# Altium PCB PCB.PcbDoc
Units mil, origin at the board's own origin, x right, y up, seen from the top; angles counter-clockwise.
Board outline 3800 x 2950 mil, 4 copper layers (Top Layer, Signal Layer 1, Signal Layer 2, Bottom Layer), stack 30.634 mil thick; 46 components, 34 nets, 210 pads, 60 vias.
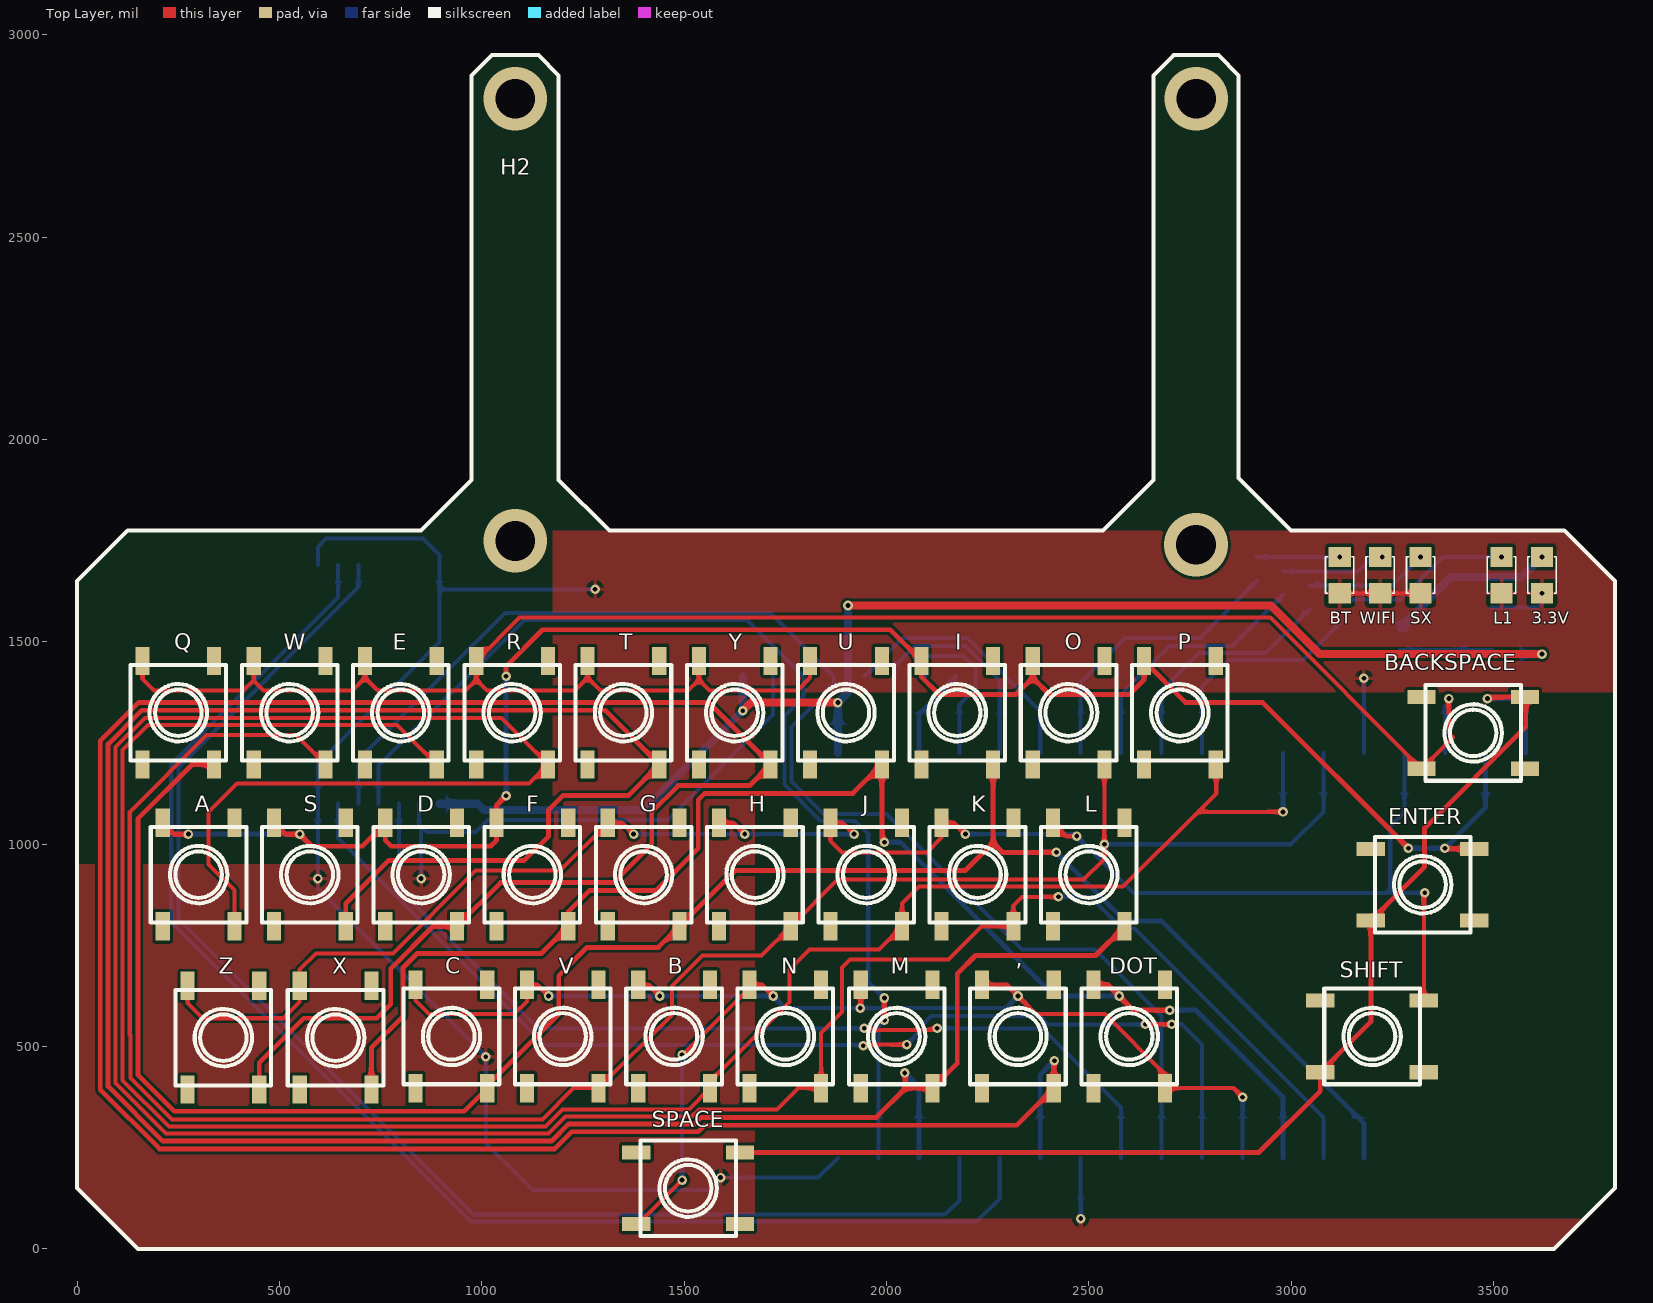
[diagram p0: Top Layer view]
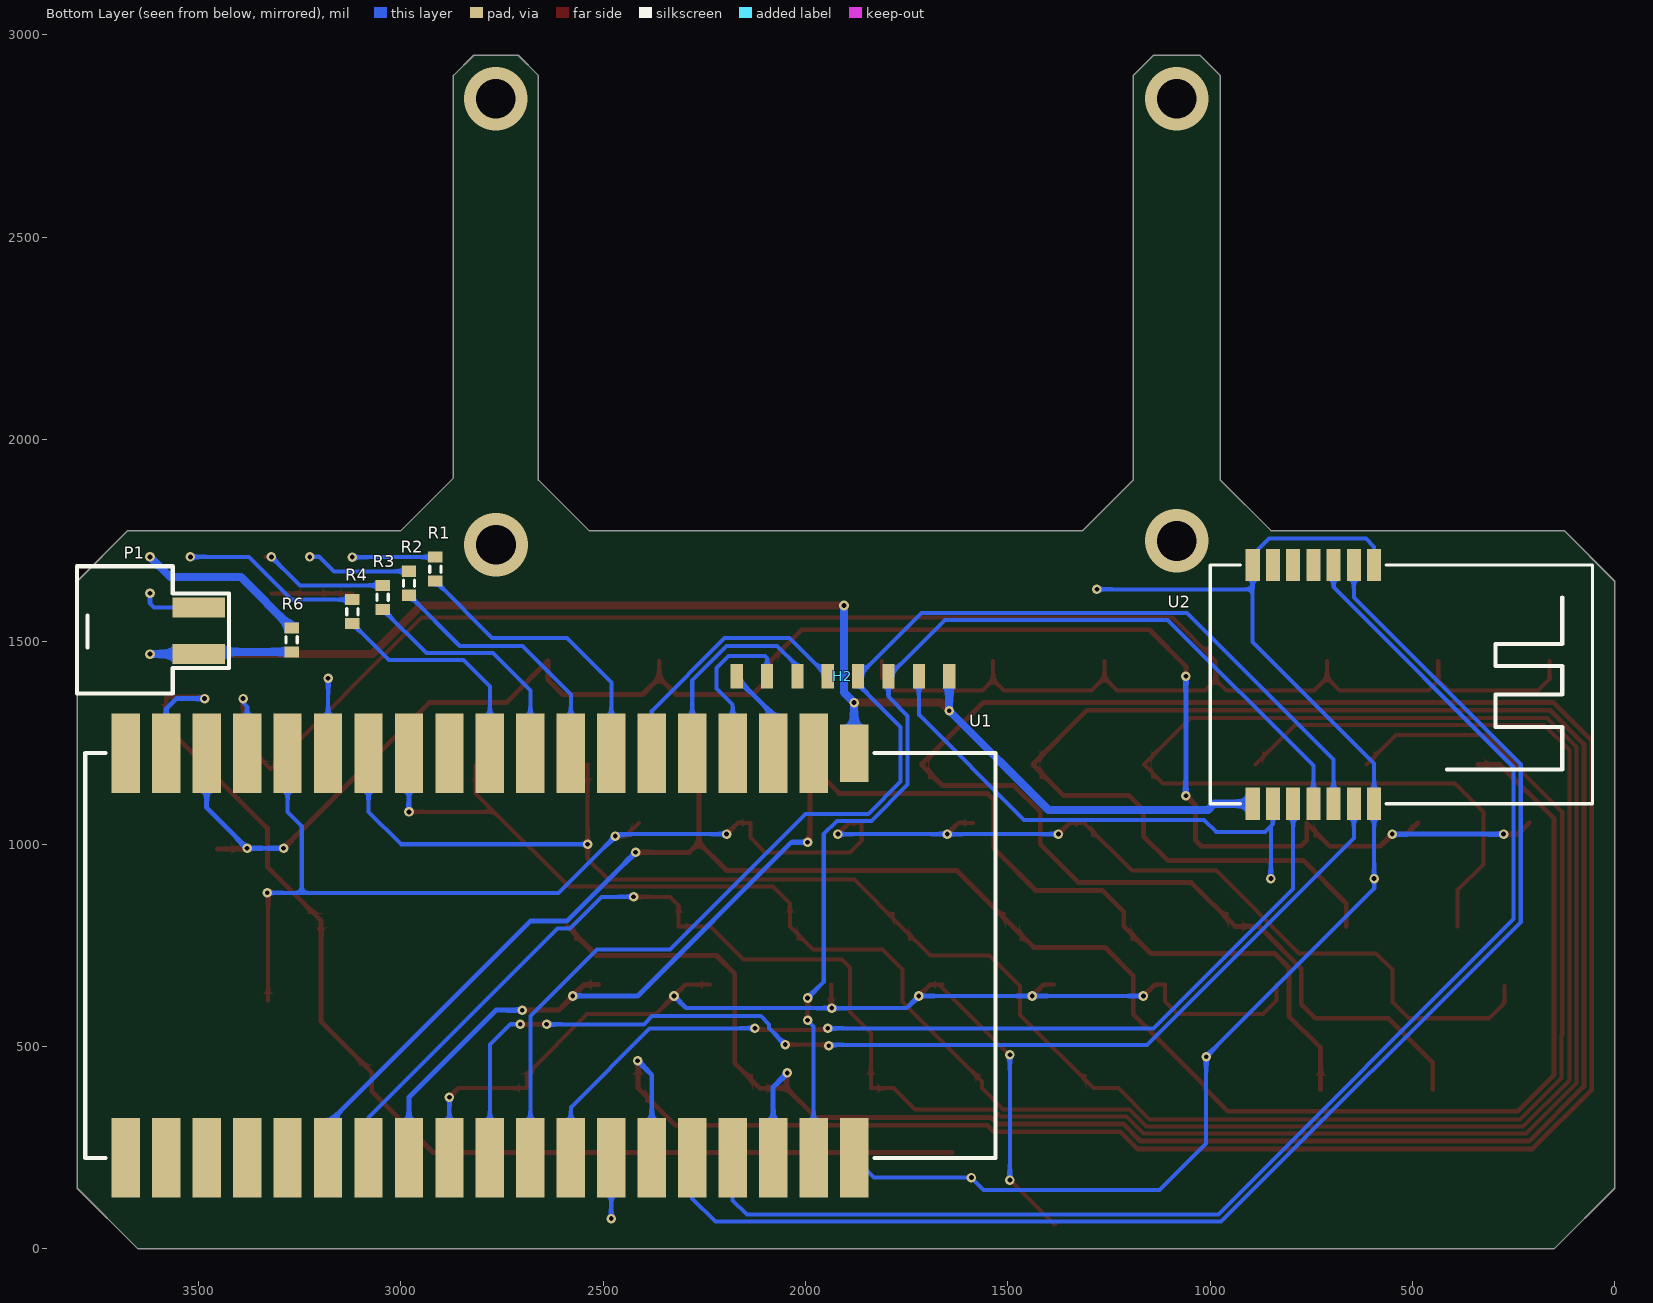
[diagram p1: Bottom Layer view, seen from below]

## Layer stack, top to bottom
Top Solder: solder mask 0.4, Solder Resist, Dk 3.5
Top Layer: signal copper 1.4
Dielectric 1: core 10, FR-4, Dk 4.2
Signal Layer 1: signal copper 1.417
Dielectric 3: prepreg 5, Dk 4.2
Signal Layer 2: signal copper 1.417
Dielectric 2: core 10, Dk 4.2
Bottom Layer: signal copper 1.4
Bottom Solder: solder mask 0.4, Solder Resist, Dk 3.5

## Board outline
0,150 150,0 3650,0 3800,150 3800,1650 3675,1775 3000,1775 2870,1905 2870,2900 2820,2950 2710,2950 2660,2900 2660,1900 2535,1775 1315,1775 1190,1900 1190,2900 1140,2950 1025,2950 975,2900 975,1900 850,1775 125,1775 0,1650

## Design rules (kind name [scope] priority, off if disabled: settings)
Clearance [All] p1: gap=7.5 ignorepadtopadclearanceinfootprint=FALSE except(0: Arc-Hole Track-Hole SMDPad-Hole THPad-Hole Via-Hole Fill-Hole Poly-Hole Region-Hole Text-Hole)
PolygonConnect [All] p1: connectstyle=Relief reliefconductorwidth=10 reliefentries=4 polygonreliefangle="90 Angle" airgapwidth=10
RoutingVias [All] p1: holewidth=11.81 width=50 viastyle="Through Hole" minholewidth=11.81 minwidth=17.72 maxholewidth=11.81 maxwidth=23.62
SolderMaskExpansion [All] p1: expansion=4
Width [All] p1: maxlimit=30 minlimit=8 preferedwidth=10 minimp=50.000000 maximp=50.000000 favimp=50.000000
30 further rules are at their usual default settings.

## Components (designator, comment, footprint, x,y, rotation, side; value= is the part's Value field where it differs from the comment)
3.3V "LED SMD" SM-LED-0805-Blue 3620,1710 r270 top (schematic designator L3.3V)
, "SW" Kha_Button 2325,525 r90 top value="Button chip 4 pin"
A "SW" Kha_Button 300,925 r90 top value="Button chip 4 pin"
B "SW" Kha_Button 1475,525 r90 top value="Button chip 4 pin"
BACKSPACE "SW" Kha_Button 3450,1275 r180 top value="Button chip 4 pin"
BT "LED SMD" SM-LED-0805-Blue 3120,1710 r270 top
C "SW" Kha_Button 925,525 r90 top value="Button chip 4 pin"
D "SW" Kha_Button 850,925 r90 top value="Button chip 4 pin"
DOT "SW" Kha_Button 2600,525 r270 top value="Button chip 4 pin"
E "SW" Kha_Button 800,1325 r90 top value="Button chip 4 pin"
ENTER "SW" Kha_Button 3325,900 r0 top value="Button chip 4 pin"
F "SW" Kha_Button 1125,925 r90 top value="Button chip 4 pin"
G "SW" Kha_Button 1400,925 r90 top value="Button chip 4 pin"
H "SW" Kha_Button 1675,925 r90 top value="Button chip 4 pin"
H2 "EInk LCD Module" EInk_Module 1870,1415 r0 top
I "SW" Kha_Button 2175,1325 r90 top value="Button chip 4 pin"
J "SW" Kha_Button 1950,925 r90 top value="Button chip 4 pin"
K "SW" Kha_Button 2225,925 r90 top value="Button chip 4 pin"
L "SW" Kha_Button 2500,925 r90 top value="Button chip 4 pin"
L1 "LED SMD" SM-LED-0805-Blue 3520,1710 r270 top
M "SW" Kha_Button 2025,525 r90 top value="Button chip 4 pin"
N "SW" Kha_Button 1750,525 r90 top value="Button chip 4 pin"
O "SW" Kha_Button 2450,1325 r90 top value="Button chip 4 pin"
P "SW" Kha_Button 2725,1325 r90 top value="Button chip 4 pin"
P1 "Header 2" "Header 2 SMT" 3700,1550 r90 bottom
Q "SW" Kha_Button 250,1325 r90 top value="Button chip 4 pin"
R "SW" Kha_Button 1075,1325 r90 top value="Button chip 4 pin"
R1 "Res3" J1-0603 2915,1680 r270 bottom value=330
R2 "Res3" J1-0603 2980,1645 r270 bottom value=330
R3 "Res3" J1-0603 3045,1610 r270 bottom value=330
R4 "Res3" J1-0603 3120,1575 r270 bottom value=330
R6 "Res3" J1-0603 3270,1505 r270 bottom value=330
S "SW" Kha_Button 575,925 r90 top value="Button chip 4 pin"
SHIFT "SW" Kha_Button 3200,525 r0 top value="Button chip 4 pin"
SPACE "SW" Kha_Button 1510,150 r180 top value="Button chip 4 pin"
SX "LED SMD" SM-LED-0805-Blue 3320,1710 r270 top
T "SW" Kha_Button 1350,1325 r90 top value="Button chip 4 pin"
U "SW" Kha_Button 1900,1325 r90 top value="Button chip 4 pin"
U1 "ESP32 Module" "ESP2 Module" 2880,725 r270 bottom
U2 "SX1280 Module" "SX1280 Module" 445,1400 r270 bottom
V "SW" Kha_Button 1200,525 r90 top value="Button chip 4 pin"
W "SW" Kha_Button 525,1325 r90 top value="Button chip 4 pin"
WIFI "LED SMD" SM-LED-0805-Blue 3220,1710 r270 top
X "SW" Kha_Button 638.58,522.05 r90 top value="Button chip 4 pin"
Y "SW" Kha_Button 1625,1325 r90 top value="Button chip 4 pin"
Z "SW" Kha_Button 361.42,522.05 r90 top value="Button chip 4 pin"

## Footprints (in the part's own frame and the unit in brackets; to place one, negate y for a bottom-side part, rotate by r counter-clockwise, add the part's x,y. Pads: shape width x height; smd on the part's side, far side on the other; paste and mask are expansions set on the pad)
EInk_Module [mil]
  rect 30x60 smd far side: 1(-225,0) 2(-150,0) 3(-75,0) 4(0,0) 5(75,0) 6(150,0) 7(225,0) 8(300,0)
"ESP2 Module" [mil]
  rect 141.73x70 smd: 1(-500,1000)
  rect 196.85x70 smd: 2(-500,900) 3(-500,800) 4(-500,700) 5(-500,600) 6(-500,500) 7(-500,400) 8(-500,300) 9(-500,200) 10(-500,100) 11(-500,0) 12(-500,-100) 13(-500,-200) 14(-500,-300) 15(-500,-400) 16(-500,-500) 17(-500,-600) 18(-500,-700) 19(-500,-800) 20(500,-800) 21(500,-700) 22(500,-600) 23(500,-500) 24(500,-400) 25(500,-300) 26(500,-200) 27(500,-100) 28(500,0) 29(500,100) 30(500,200) 31(500,300) 32(500,400) 33(500,500) 34(500,600) 35(500,700) 36(500,800) 37(500,900) 38(500,1000)
  silkscreen extent -500,-900 500,1350
"Header 2 SMT" [mil]
  rect 50x130 smd: 1(-80,-200) 2(35,-200)
  silkscreen extent -178,-275 137,100
J1-0603 [mm] "Chip Resistor, Body 1.6x0.8mm, IPC High Density"
  rect 0.7x0.9 smd: 1(-0.75,0) 2(0.75,0)
  silkscreen extent -0.2,-0.35 0.2,0.35, body extent -0.85,-0.48 0.85,0.48, height 0.9
Kha_Button [mil] "SW button 4pin, 250 x250 mil"
  rect 70x35 smd: 1(-127.95,88.58) 2(127.95,88.58) 3(-127.95,-88.58) 4(127.95,-88.58)
  silkscreen extent -118,-118 118,118
SM-LED-0805-Blue [mil]
  rect 50x55 smd: 1(0,0) 2(90,0)
  silkscreen extent 0,-35 90,35, body extent 5,-25 85,25, height 43
"SX1280 Module" [mil]
  rect 80x35 smd: 1(-290,-150) 2(-290,-200) 3(-290,-250) 4(-290,-300) 5(-290,-350) 6(-290,-400) 7(-290,-450) 8(300,-450) 9(300,-400) 10(300,-350) 11(300,-300) 12(300,-250) 13(300,-200) 14(300,-150)
  silkscreen extent -290,-555 300,390

## Part data
3.3V BT L1 SX WIFI: library part LED-SMD-0805
, A B BACKSPACE C D DOT E ENTER F G H I J K L M N O P Q R S SHIFT SPACE T U V W X Y Z: library part SW4, "Switch button 4 pin"
H2: library part "E-Ink LCD"
P1: "Header, 2-Pin", LatestRevisionDate=17-Jul-2002, LatestRevisionNote="Re-released for DXP Platform.", Publisher="Altium Limited"
R1 R2 R3 R4 R6: "Resistor", LatestRevisionDate=29-May-2009, LatestRevisionNote="IPC-7351 Footprint Added.", PackageDescription="Chip Resistor", PackageReference=J1-0603, Published=8-Jun-2000, Publisher="Altium Limited"
U1: library part ESP32_Module

## Via types
v1: diameter 23.62, hole 11.81, Top Layer to Bottom Layer, 56 vias
v2: diameter 157.48, hole 98.43, Top Layer to Bottom Layer, 4 vias

## Nets (pads, with @x,y where several pads share a name; then routed paths per layer and width w, separated by ;. In a path a pad name is that pad's centre, name@x,y a point inside that pad or via, vN(x,y) a via of type N, cw(c..) or ccw(c..) an arc to the next point about the centre after c; other vN are vias at no path point)
3.3V: H2.1 P1.1 R6.2 U1.1 U2.8 | length 3678.3
  Top Layer w20: v1(1645,1330) 1665,1350 v1(1880,1350) ; v1(1905,1590) 2950.28,1590 3070.28,1470 v1(3620,1470)
  Bottom Layer w20: U2.8 990,1100 1005,1085 1400,1085 v1(1645,1330) H2.1 ; U1.1 v1(1880,1350) 1905,1375 v1(1905,1590) ; R6.2 3494.53,1475.47 P1.1 v1(3620,1470)
5V: U1.19
COL1: C.3 G.3 I.3 Q.3 U1.25 | length 4844.8
  Top Layer w12: Q.3 283.92,1197.05 150,1063.13 150,430 240,340 956.54,340 C.3 1013.58,403.58 1190.31,580.31 1190.31,635.48 1190,635.8 1190,675 1260,745 1436.54,745 G.3 1626.54,935 2195,935 2263.58,1003.58 ; I.3 2263.58,1003.58 ; v1(2420,980) 2287.17,980 2263.58,1003.58
  Bottom Layer w12: v1(2420,980) 2590,810 2680,810 3180,310 U1.25
COL2: H.3 O.3 U1.13 V.3 W.3 | length 4961.8
  Top Layer w10: W.3 540.63,1270 320,1270 130,1080 130,530 131.5,528.5 131.5,422.34 233.84,320 1150,320 1227.05,397.05 V.3 1470,578.46 1470,650 1545,725 1691.54,725 H.3 1879.04,912.5 2487.5,912.5 2538.58,963.58 v1(2538.58,1000) O.3
  Bottom Layer w10: v1(2538.58,1000) 3000,1000 3080,1080 U1.13
COL3: B.3 E.3 J.3 P.3 U1.12 | length 5266.2
  Top Layer w10: E.3 790.63,1295 175,1295 112.5,1232.5 112.5,416.59 226.59,302.5 1157.25,302.5 1199.75,345 1511.54,345 B.3 1563.58,413.58 1760,610 1760,690 1810,740 1981.54,740 J.3 2038.58,853.58 2080,895 2585,895 2770,1080 ; P.3 2815,1195.63 2815,1125 2770,1080 ; v1(2980,1080) 2770,1080
  Bottom Layer w10: v1(2980,1080) U1.12
COL4: A.3 K.3 N.3 R.3 U1.26 | length 6952.5
  Top Layer w10: A.3 388.58,886.42 325,950 325,1080 394.55,1149.55 1116.08,1149.55 R.3 1048.13,1312.5 167.75,1312.5 95,1239.75 95,409.34 219.34,285 1164.5,285 1207,327.5 1518.78,327.5 1536.28,345 1730,345 1782.05,397.05 N.3 1838.58,533.58 1890,585 1890,695 1910,715 2152.95,715 2235,797.05 K.3 2313.58,848.58 2335,870 v1(2425,870)
  Bottom Layer w10: v1(2425,870) 2503.84,870 2582.34,791.5 2613.5,791.5 3080,325 U1.26
COL5: L.3 M.3 S.3 T.3 U1.36 | length 6490.7
  Top Layer w12: S.3 663.58,853.58 770,960 1105,960 1165,1020 1165,1085 1200,1120 1361.54,1120 T.3 1304.63,1331 160.09,1331 76.5,1247.41 76.5,401.68 211.68,266.5 1172.16,266.5 1214.66,309 1526.45,309 1542.45,325 1975,325 2047.05,397.05 ; v1(2045,435) 2047.05,432.95 2047.05,397.05 ; L.3 2516.54,725 2220,725 2175,680 2175,458.46 M.3 2047.05,397.05
  Bottom Layer w12: v1(2045,435) 2080,400 U1.36
COL6: ,.3 D.3 U1.33 Y.3 Z.3 | length 7156.8
  Top Layer w12: Z.3 450,460 560,570 740,570 775,605 775,692.58 879.47,797.05 D.3 1046.54,905 1325,905 1420,1000 1420,1080 1485,1145 1661.54,1145 Y.3 1560.13,1350.5 152.01,1350.5 57,1255.49 57,393.6 203.6,247 1180.24,247 1222.74,289.5 1534.52,289.5 1550.52,305.5 2322.04,305.5 2413.58,397.05 2413.58,463.58 v1(2415,465)
  Bottom Layer w12: U1.33 2380,430 v1(2415,465)
COL7: DOT.3 F.3 U1.27 U.3 X.3 | length 3482.2
  Top Layer w12: X.3 727.17,497.17 805.42,575.42 805.42,695.42 840,730 1146.54,730 F.3 1213.58,833.58 1265.5,885.5 1430.5,885.5 1535,990 1535,1110 1550.5,1125.5 1917.04,1125.5 U.3 1988.58,1011.42 v1(1995,1005) ; DOT.3 2547.05,652.95 v1(2575,625) 2610,590 v1(2700,590)
  Bottom Layer w12: v1(1995,1005) 2035,1005 2415,625 v1(2575,625) ; v1(2700,590) 2765,590 2980,375 U1.27
COL8: BACKSPACE.3 ENTER.3 SHIFT.3 SPACE.3 U1.18 | length 2991.4
  Top Layer w12: SPACE.3 2920.63,238.58 3072.05,390 SHIFT.3 3197.05,561.42 ENTER.3 3330,944.37 3330,1040 3580,1290 3580,1361.54 BACKSPACE.3 3488.58,1363.58 v1(3485,1360)
  Bottom Layer w12: v1(3485,1360) 3555,1360 3580,1335 U1.18
GND: 3.3V.2 BT.2 H2.2 L1.2 P1.2 SX.2 U1.14 U1.32 U1.38 U2.1 U2.7 U2.9 U2.14 WIFI.2 | length 5425.2
  Top Layer w10: BT.2 WIFI.2 SX.2
  Bottom Layer w10: U2.1 595,1735 615,1755 855.18,1755 895,1715.18 U2.7 895,1630 ; U2.9 845,1050 850,1045 ; v1(850,915) 850,1045 ; v1(1280,1630) 895,1630 ; H2.2 1720,1320 1460,1060 1015,1060 985,1030 865,1030 850,1045 ; U1.38 1831.25,176.25 v1(1590,176.25) 1590,175 1560,145 1125,145 1010,260 v1(1010,475) 595,890 v1(595,915) U2.14 595,1200 895,1500 895,1630 ; v1(2480,75) U1.32 ; U1.14 v1(3180,1410) ; P1.2@3495,1585 3610,1585 3620,1595 v1(3620,1620)
LCD_BUSY: H2.8 U1.3 | length 227.3
  Bottom Layer w12: U1.3 2080,1320 2170,1410 H2.8
LCD_CE0: H2.5 U1.6 | length 653.8
  Bottom Layer w10: H2.5 2040,1510 2199.75,1510 2380,1329.75 U1.6
LCD_CS: H2.6 U1.5 | length 520.9
  Bottom Layer w10: H2.6 2020,1440 2070,1490 2195,1490 2280,1405 U1.5
LCD_RESET: H2.7 U1.4 | length 411.1
  Bottom Layer w10: H2.7 2095,1460 2100,1465 2190,1465 2220,1435 2220,1385 2180,1345 U1.4
MISO: U1.31 U2.10 | length 2347.4
  Top Layer w10: v1(1945,545) 1949.31,540.69 2120.69,540.69 v1(2125,545)
  Bottom Layer w10: U2.10 795,889.75 1139.75,545 v1(1945,545) ; v1(2125,545) 2385,545 2580,350 U1.31
MOSI: H2.3 U1.37 U2.11 | length 2719.3
  Top Layer w10: v1(1995,565) v1(1995,620)
  Bottom Layer w10: U2.11 745,1194.31 1105,1554.31 1655.69,1554.31 H2.3 1795,1364.75 1747.5,1317.25 1747.5,1147.5 1837.5,1057.5 1922.5,1057.5 1955,1025 1955,660 v1(1995,620) ; U1.37 1980,550 v1(1995,565)
NetBT_1: BT.1 R1.1 | length 205.5
  Top Layer w10: v1(3120,1709.53) BT.1
  Bottom Layer w10: R1.1 v1(3120,1709.53)
NetL1_1: L1.1 R4.1 | length 443.7
  Bottom Layer w10: R4.1 3270,1604.53 3375.47,1710 v1(3520,1710)
NetL3.3V_1: 3.3V.1 R6.1 | length 422.7
  Bottom Layer w20: R6.1 3395.47,1660 3570,1660 v1(3620,1710)
NetR1_2: R1.2 U1.7 | length 713.7
  Bottom Layer w10: U1.7 2480,1400 2590,1510 2774.53,1510 R1.2
NetR2_1: R2.1 WIFI.1 | length 259.7
  Bottom Layer w10: R2.1 3165.47,1674.53 3200.94,1710 v1(3225,1710)
NetR2_2: R2.2 U1.8 | length 646.7
  Bottom Layer w10: U1.8 2580,1370 2700,1490 2854.53,1490 R2.2
NetR3_1: R3.1 SX.1 | length 319.2
  Top Layer w10: v1(3320,1710) SX.1@3335,1710
  Bottom Layer w10: R3.1 3249.53,1639.53 v1(3320,1710)
NetR3_2: R3.2 U1.9 | length 603
  Bottom Layer w10: U1.9 2680,1380 2772.5,1472.5 2937.03,1472.5 R3.2
NetR4_2: R4.2 U1.10 | length 569.4
  Bottom Layer w10: U1.10 2780,1390 2845,1455 3029.53,1455 R4.2
nSS: U1.29 U2.13 | length 2777.5
  Top Layer w10: v1(1942.84,502.16) 1942.84,502.84 1945,505 v1(2050,505) ; v1(2640,555) v1(2705,555)
  Bottom Layer w10: U2.13 645,1015 1155.69,504.31 1940.69,504.31 v1(1942.84,502.16) ; v1(2050,505) 2090.69,545.69 2090.69,555.07 2110.62,575 2379.75,575 2399.75,555 v1(2640,555) ; v1(2705,555) 2730,555 2780,505 U1.29
ROW1: BACKSPACE.2 E.2 Q.2 R.2 T.2 U1.16 U.2 W.2 Y.2 | length 4986.7
  Top Layer w10: Q.2 161.42,1408.58 190,1380 410,1380 436.42,1406.42 ; W.2 436.42,1406.42 ; E.2 711.42,1411.42 ; T.2 1261.42,1411.42 ; Y.2 1536.42,1406.42 ; U.2 1811.42,1411.42 1780,1380 1562.83,1380 1536.42,1406.42 ; v1(3390,1360) 3390,1274.37 3400,1264.37 BACKSPACE.2 2948.46,1560 1093.46,1560 R.2 986.42,1406.42 ; 436.42,1406.42 436.42,1403.58 460,1380 680,1380 711.42,1411.42 ; 711.42,1411.42 742.83,1380 960,1380 986.42,1406.42 ; 986.42,1406.42 1012.83,1380 1230,1380 1261.42,1411.42 ; 1261.42,1411.42 1292.83,1380 1510,1380 1536.42,1406.42
  Bottom Layer w10: U1.16 3380,1340 3390,1350 v1(3390,1360)
ROW2: A.2 D.2 ENTER.2 F.2 I.2 O.2 P.2 S.2 U1.17 | length 4568.5
  Top Layer w12: A.2 239.37,1025 v1(275,1025) ; S.2 514.37,1025 v1(550,1025) 580,995 705,995 D.2@761.42,1051.42 ; D.2 D.2@761.42,1051.42 ; v1(1060,1120) 1036.42,1096.42 F.2 1036.42,1010 1021.42,995 776.42,995 761.42,1010 D.2@761.42,1051.42 ; v1(1060,1415) 1060,1440 1150,1530 2009.37,1530 I.2 2086.42,1413.58 2130,1370 2320,1370 2361.42,1411.42 ; O.2 2361.42,1411.42 ; v1(3290,990) 2930,1350 2739.37,1350 P.2 2636.42,1406.42 2600,1370 2402.83,1370 2361.42,1411.42 ; v1(3380,990) 3381.42,988.58 ENTER.2
  Bottom Layer w12: v1(275,1025) v1(550,1025) ; v1(1060,1120) v1(1060,1415) ; v1(3290,990) v1(3380,990) 3480,1090 U1.17
ROW3: G.2 H.2 J.2 K.2 L.2 SHIFT.2 U1.15 X.2 Z.2 | length 4456.2
  Top Layer w10: Z.2 272.83,607.17 310,570 510,570 550,610 X.2 550,690 590,730 780,730 985,935 1193.46,935 G.2 1347.05,1052.95 v1(1375,1025) ; H.2 1622.05,1052.95 v1(1650,1025) ; v1(1920,1025) 1892.05,1052.95 J.2 1861.42,1008.58 1890,980 2100,980 2136.42,1016.42 K.2 2167.05,1052.95 v1(2195,1025) ; L.2 2444.37,1020 v1(2470,1020) ; SHIFT.2 3327.95,877.95 v1(3330,880)
  Bottom Layer w10: v1(1375,1025) v1(1650,1025) v1(1920,1025) ; v1(2195,1025) 2465,1025 v1(2470,1020) 2610,880 3245,880 ; U1.15 3280,1080 3245,1045 3245,880 ; v1(3330,880) 3245,880
ROW4: ,.2 B.2 C.2 DOT.2 M.2 N.2 SPACE.2 U1.28 V.2 | length 3469.5
  Top Layer w10: C.2 836.42,613.58 870,580 1080,580 1111.42,611.42 V.2 1137.05,652.95 v1(1165,625) ; SPACE.2 1386.42,61.42 v1(1495,170) ; B.2 1412.05,652.95 v1(1440,625) ; v1@1496.02,478.98 N.2@1670,652.95 ; N.2 N.2@1670,652.95 ; v1(1720,625) 1692.05,652.95 N.2@1670,652.95 ; v1(1935,595) 1936.42,596.42 M.2 ; 2236.42,652.95 2297.05,652.95 v1(2325,625) 2370,580 2540,580 2688.58,431.42 DOT.2 2857.95,397.05 v1(2880,375)
  Bottom Layer w10: v1(1165,625) v1(1440,625) v1(1720,625) 1750,595 v1(1935,595) 2295,595 v1(2325,625) ; v1(1495,170) v1(1495,480) ; U1.28 v1(2880,375)
SCK: H2.4 U1.30 U2.12 | length 3308.4
  Bottom Layer w10: U2.12 695,1209.75 1057.06,1571.81 1713.19,1571.81 H2.4 1870,1395 1765,1290 1765,1155 1845,1075 2000,1075 2335,740 2515,740 2680,575 U1.30
SX1280_BUSY: U1.35 U2.3 | length 3411.2
  Bottom Layer w10: U2.3 695,1635.25 250,1190.25 250,815 980,85 2145,85 2180,120 U1.35
SX1280_nRESET: U1.34 U2.2 | length 3531.1
  Bottom Layer w10: U2.2 645,1610 232.5,1197.5 232.5,807.75 972.75,67.5 2222.5,67.5 2280,125 U1.34
pads on no net: ,.1 ,.4 A.1 A.4 B.1 B.4 BACKSPACE.1 BACKSPACE.4 C.1 C.4 D.1 D.4 DOT.1 DOT.4 E.1 E.4 ENTER.1 ENTER.4 F.1 F.4 G.1 G.4 H.1 H.4 I.1 I.4 J.1 J.4 K.1 K.4 L.1 L.4 M.1 M.4 N.1 N.4 O.1 O.4 P.1 P.4 Q.1 Q.4 R.1 R.4 S.1 S.4 SHIFT.1 SHIFT.4 SPACE.1 SPACE.4 T.1 T.4 U1.2 U1.11 U1.20 U1.21 U1.22 U1.23 U1.24 U2.4 U2.5 U2.6 U.1 U.4 V.1 V.4 W.1 W.4 X.1 X.4 Y.1 Y.4 Z.1 Z.4
copper on no net:
  other v2: 2765,1740 1082.6,1749.65 1082.6,2842.17 2765.67,2842.17

## Polygon pours and split planes (outlines as drawn)
GND on Top Layer "Top Layer-GND" (solid, pour order 30): 150,0 0,150 0,950 1175,950 1175,1775 1315,1775 2585,1775 2680,1775 2860,1775 2895,1775 3000,1775 3675,1775 3800,1650 3800,1375 1675,1375 1675,75 3725,75 3650,0

## Silkscreen, mask and mechanical layers (free items; w line width, h text height)
Top Overlay:
  the board outline again, w10

## Dimensions
0,1730 to 3800,1730 on Top Overlay
1070,2970 to 1540,-15 on Top Overlay